# EAGLE board PROYECTO OSCAR (EAGLE 9.6.2)
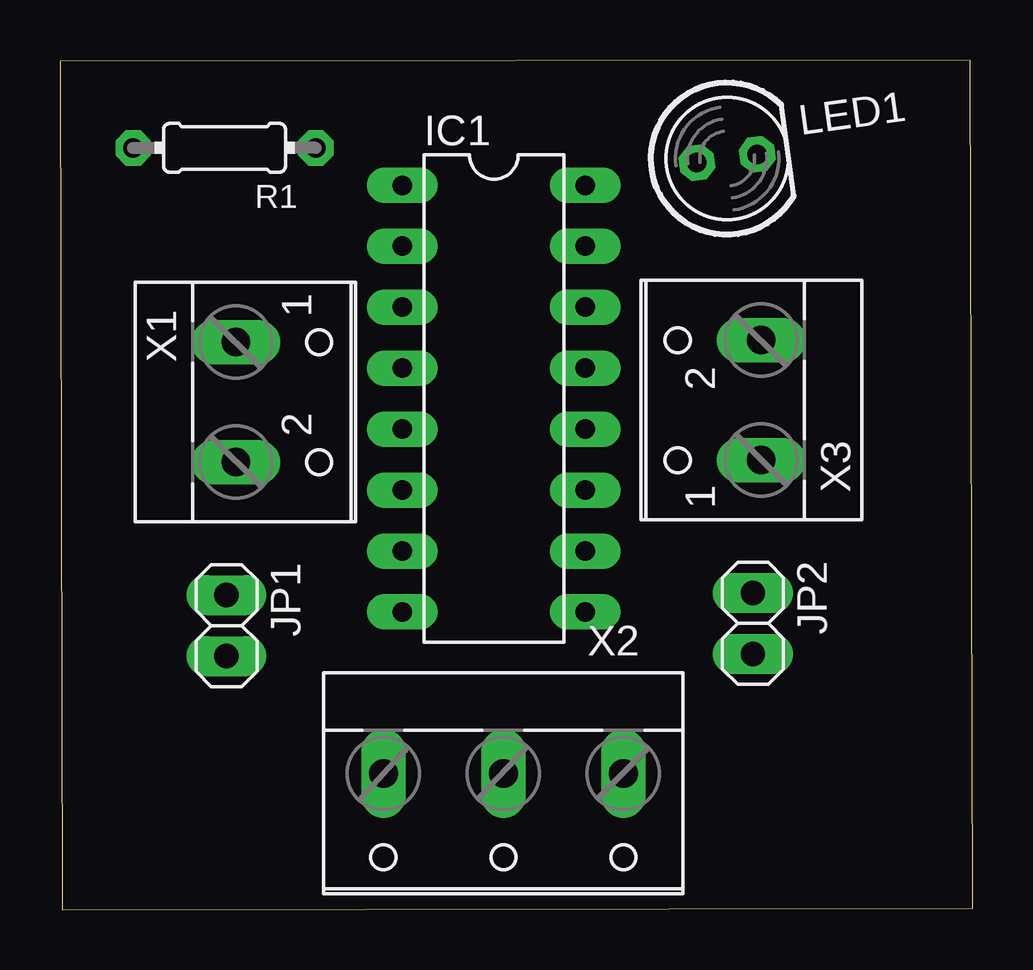
[diagram p0: board, top side]
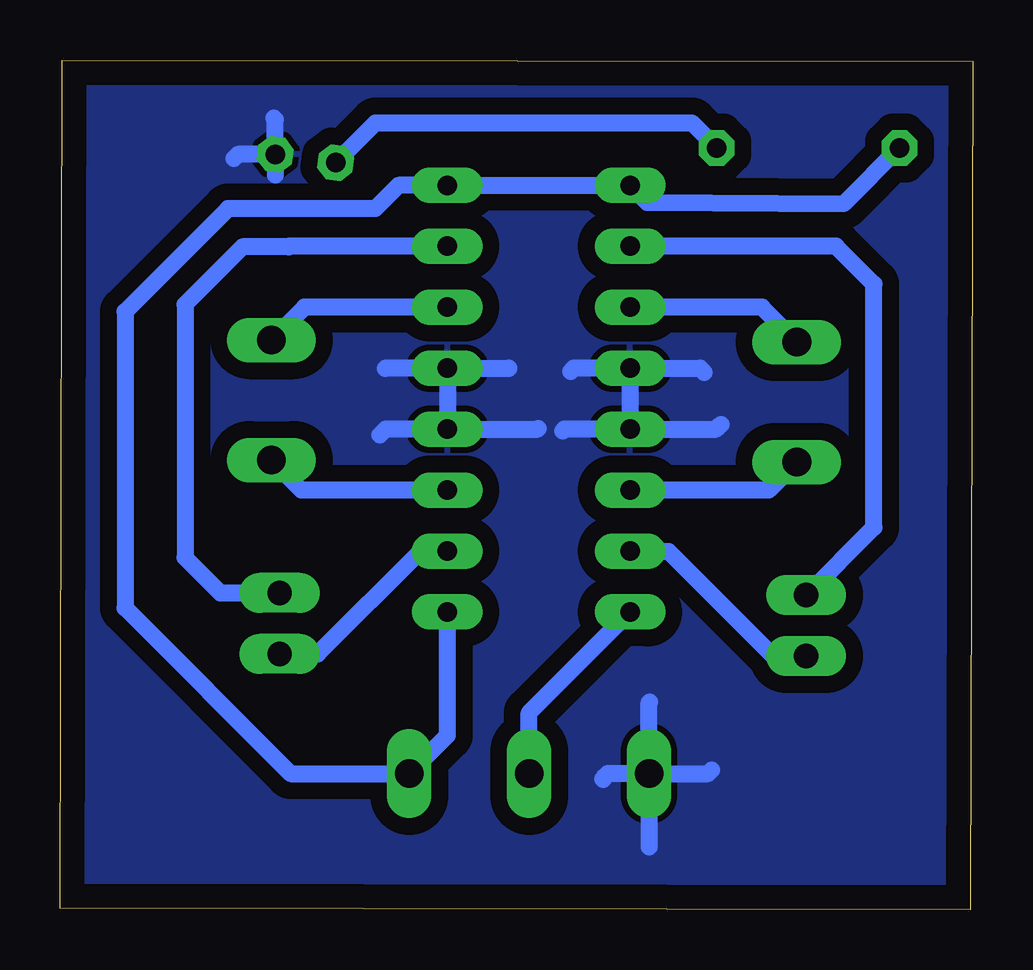
[diagram p1: board, bottom side, seen from below]

Size 38.05 x 35.4 mm. Coordinates in mm from the lower left corner, seen from the top.
Outline: 0.1,0 38.05,0.06 37.94,35.4 0,35.34 0.1,0
Copper layers (1*16): Top 0.035mm / dielectric 1.5mm / Bottom 0.035mm
Design rules "default *": minimum track width 0.7mm, minimum drill 0.35mm, track to track 0.7mm, track to pad 0.7mm, pad to pad 6mil, via to via 6mil, smd to smd 6mil, copper to edge 40mil, drill to drill 6mil, minimum pad ring 13mil, minimum via ring 8mil, stop-mask expansion 4mil, vias tented up to drill 0mil, thermal gap 10mil

## Footprints (pad centres in the part's own frame; a part is rotated, then mirrored left to right if it is on the bottom)
DIL16 = drill 0.813 long: 1 -8.89,-3.81; 2 -6.35,-3.81; 3 -3.81,-3.81; 4 -1.27,-3.81; 5 1.27,-3.81; 6 3.81,-3.81; 7 6.35,-3.81; 8 8.89,-3.81; 9 8.89,3.81; 10 6.35,3.81; 11 3.81,3.81; 12 1.27,3.81; 13 -1.27,3.81; 14 -3.81,3.81; 15 -6.35,3.81; 16 -8.89,3.81
1X02 = drill 1.016 long: 1 -1.27,0; 2 1.27,0
LED5MM = drill 0.813 octagon: A -1.27,0; K 1.27,0
0204/7 = drill 0.813 octagon: 1 -3.81,0; 2 3.81,0
W237-102 = drill 1.194 long: 1 -2.5,-1.27; 2 2.5,-1.27
W237-103 = drill 1.194 long: 1 -5,-1.29; 2 0,-1.29; 3 5,-1.29

## Placement (x,y rotation side)
IC1  L293D  [DIL16]  18.09,21.29 270 top
JP1  [1X02]  6.94,11.84 270 top
JP2  [1X02]  28.89,11.93 270 top
LED1  [LED5MM]  27.81,31.3 7.8 top
R1  [0204/7]  6.86,31.74 0 top
X1  [W237-102]  8.6,21.15 270 top
X2  [W237-103]  18.49,4.38 180 top
X3  [W237-102]  27.96,21.23 90 top

## Library data of the parts
IC1 = st-microelectronics; MPN: L293D; OC_FARNELL: 9589619; OC_NEWARK: 56P8249
JP1 JP2 = pinhead
LED1 = led
R1 = rcl; SPICEPREFIX: R
X1 X3 = con-wago-500; MPN: 237-102; OC_FARNELL: unknown; OC_NEWARK: 70K9898
X2 = con-wago-500; MPN: 237-103; OC_FARNELL: unknown; OC_NEWARK: 18M7116

## Nets
BACK_L: IC1.7 JP1.2
BACK_R: IC1.10 JP2.2
FWD_L: IC1.2 JP1.1
FWD_R: IC1.15 JP2.1
GND: IC1.4 IC1.5 IC1.12 IC1.13 LED1.K X2.3
N$1: LED1.A R1.2
N$2: IC1.3 X1.1
N$3: IC1.6 X1.2
N$4: IC1.14 X3.2
N$5: IC1.11 X3.1
VCC: IC1.1 IC1.9 IC1.16 R1.1 X2.1
VSS: IC1.8 X2.2

## Tracks (layer width: path | path; a pad name or v marks a point on that pad's centre or on a via)
BACK_L
  Bottom 0.7: IC1.7 14.27,14.93 12.68,14.93 8.31,10.56 JP1.2
BACK_R
  Bottom 0.7: JP2.2 27.3,10.66 23.02,14.94 IC1.10
FWD_L
  Bottom 0.7: JP1.1 4.11,15.93 4.11,26.06 5.69,27.64 IC1.2
FWD_R
  Bottom 0.7: IC1.15 28.47,27.64 28.5,27.61 30.44,27.61 32.83,25.22 32.83,14.67 31.36,13.2 JP2.1
GND
  Bottom 0.7: X2.3 15.2,5.67 15.43,5.45 15.39,5.41 | X2.3 13.49,8.63 13.46,8.65 | X2.3 13.49,2.61 | X2.3 11.03,5.67 10.89,5.82 | IC1.5 17.02,20.02 17.1,19.95 | IC1.4 16.62,22.56 16.76,22.42 | IC1.4 IC1.5 | IC1.13 IC1.12 | IC1.13 19.34,22.56 19.33,22.56 | IC1.13 24.47,22.56 | IC1.12 24.47,20.02 24.71,19.78 | IC1.12 18.13,20.02 18.1,20.05 | IC1.5 10.68,20.02 10.49,20.22 | IC1.4 11.36,22.56 11.19,22.39 | LED1.K 30.62,31.47 30.79,31.3 | LED1.K 29.07,32.92 29.13,32.98 | LED1.K 29.07,30.61
  pour Bottom: 0.1,0 0,35.34 37.93,35.41 38.03,0.06
N$1
  Bottom 0.7: LED1.A 24.89,32.78 11.71,32.78 R1.2
N$2
  Bottom 0.7: X1.1 8.78,25.1 IC1.3
N$3
  Bottom 0.7: X1.2 8.49,17.48 IC1.6
N$4
  Bottom 0.7: IC1.14 27.86,25.1 X3.2
N$5
  Bottom 0.7: IC1.11 27.98,17.48 X3.1
VCC
  Bottom 0.7: R1.1 5.38,29.41 13.57,29.47 IC1.1 IC1.16 23.93,30.18 24.9,29.21 31.04,29.21 35.33,24.92 35.33,12.57 28.43,5.67 X2.1 21.9,7.26 IC1.9
VSS
  Bottom 0.7: X2.2 18.49,8.19 IC1.8